# EAGLE board CT_schematic (EAGLE 7.6.0)

Size 100 x 80 mm. Coordinates in mm from the lower left corner, seen from the top.
Outline: 0,0 100,0 100,80 0,80 0,0
Copper layers (1*16): Top 0.035mm / dielectric 1.5mm / Bottom 0.035mm
Design rules "default": minimum track width 10mil, minimum drill 24mil, track to track 8mil, track to pad 8mil, pad to pad 8mil, via to via 8mil, smd to smd 8mil, copper to edge 40mil, drill to drill 8mil, minimum pad ring 10mil, minimum via ring 8mil, stop-mask expansion 4mil, vias tented up to drill 0mil, thermal gap 10mil

## Footprints (pad centres in the part's own frame; a part is rotated, then mirrored left to right if it is on the bottom)
C0603 = smd 0.8 x 0.8: 1 -0.762,0; 2 0.762,0
C0402 = smd 0.5 x 0.5: 1 -0.508,0; 2 0.508,0
C1206 = smd 1.3 x 1.6: 1 -1.524,0; 2 1.524,0
C1210 = smd 1.2 x 2.5: 1 -1.524,0; 2 1.524,0
EXV-9H = smd 3.505 x 1.676: 1 -2.857,0; 2 2.857,0
L0603 = smd 0.8 x 0.8: 1 -0.762,0; 2 0.762,0
L1210 = smd 1.2 x 2.5: 1 -1.524,0; 2 1.524,0
PJ-037B_PACKAGE = drill 3.7 square: 1 12,0 | drill 3.2 square: 2 6,0
R0603 = smd 0.8 x 0.8: 1 -0.762,0; 2 0.762,0
WLCSP49 = smd 0.25 x 0.25: A1 -1.2,1.2; A2 -0.8,1.2; A3 -0.4,1.2; A4 0,1.2; A5 0.4,1.2; A6 0.8,1.2; A7 1.2,1.2; B1 -1.2,0.8; B2 -0.8,0.8; B3 -0.4,0.8; B4 0,0.8; B5 0.4,0.8; B6 0.8,0.8; B7 1.2,0.8; C1 -1.2,0.4; C2 -0.8,0.4; C3 -0.4,0.4; C4 0,0.4; C5 0.4,0.4; C6 0.8,0.4; C7 1.2,0.4; D1 -1.2,0; D2 -0.8,0; D3 -0.4,0; D4 0,0; D5 0.4,0; D6 0.8,0; D7 1.2,0; E1 -1.2,-0.4; E2 -0.8,-0.4; E3 -0.4,-0.4; E4 0,-0.4; E5 0.4,-0.4; E6 0.8,-0.4; E7 1.2,-0.4; F1 -1.2,-0.8; F2 -0.8,-0.8; F3 -0.4,-0.8; F4 0,-0.8; F5 0.4,-0.8; F6 0.8,-0.8; F7 1.2,-0.8; G1 -1.2,-1.2; G2 -0.8,-1.2; G3 -0.4,-1.2; G4 0,-1.2; G5 0.4,-1.2; G6 0.8,-1.2; G7 1.2,-1.2
TST-110-05-T-D-RA = drill 1 pad 1.7 square: 1 0,0 | drill 1 pad 1.7: 2 0,2.54; 3 2.54,0; 4 2.54,2.54; 5 5.08,0; 6 5.08,2.54; 7 7.62,0; 8 7.62,2.54; 9 10.16,0; 10 10.16,2.54; 11 12.7,0; 12 12.7,2.54; 13 15.24,0; 14 15.24,2.54; 15 17.78,0; 16 17.78,2.54; 17 20.32,0; 18 20.32,2.54; 19 22.86,0; 20 22.86,2.54
SSOP-16 = smd 1.981 x 0.356: 1 -2.464,2.223; 2 -2.464,1.587; 3 -2.464,0.953; 4 -2.464,0.318; 5 -2.464,-0.318; 6 -2.464,-0.953; 7 -2.464,-1.587; 8 -2.464,-2.223; 9 2.464,-2.223; 10 2.464,-1.587; 11 2.464,-0.953; 12 2.464,-0.318; 13 2.464,0.318; 14 2.464,0.953; 15 2.464,1.587; 16 2.464,2.223
HTSS-105-01-G-D = drill 1 pad 1.8 square: 1 0,0 | drill 1 pad 1.8: 2 0,2.54; 3 2.54,0; 4 2.54,2.54; 5 5.08,0; 6 5.08,2.54; 7 7.62,0; 8 7.62,2.54; 9 10.16,0; 10 10.16,2.54
DFN8-S = smd 0.6 x 0.4: 1 -2.69,1.905; 2 -2.69,0.635; 3 -2.69,-0.635; 4 -2.69,-1.905; 5 2.69,-1.905; 6 2.69,-0.635; 7 2.69,0.635; 8 2.69,1.905
ABS07-32.768KHZ-7-T = smd 1.1 x 2.4: 1 -2.5,0; 2 0,0
ABLS-25.000MHZ-B2F-T = smd 5.6 x 2.8: 1 -3.81,0; 2 5.69,0
WSON-8 = smd 0.3 x 0.6: 1 -0.75,0; 2 0.05,0; 3 0.85,0; 4 1.65,0; 5 1.65,3.8; 6 0.85,3.8; 7 0.05,3.8; 8 -0.75,3.8 | smd 3 x 2.6: PAD 0.45,1.9
SON-6 = smd 0.55 x 0.3: 1 -0.355,0.5 | smd 0.52 x 0.3: 2 -0.37,0; 3 -0.37,-0.5; 4 0.37,-0.5; 5 0.37,0; 6 0.37,0.5
SW_4-1437565-2 = smd 1.4 x 2.1: 1 -2.23,4.55; 2 -2.23,-4.55; 3 2.23,4.55; 4 2.23,-4.55
LGM67K-G1J2-24-Z = smd 0.8 x 1.4: A -2,0; C 0,0
NC7SZ125M5X = smd 1.3 x 0.7: 1 -1.3,0.95; 2 -1.3,0; 3 -1.3,-0.95; 4 1.3,-0.95; 5 1.3,0.95

## Placement (x,y rotation side)
C1  1e-06  [C0603]  -46.99,57.15 0 top  (outside the outline)
C2  1e-07  [C0603]  -50.8,57.15 0 top  (outside the outline)
C3  1e-07  [C0603]  -54.61,57.15 0 top  (outside the outline)
C4  1e-07  [C0603]  -58.42,57.15 0 top  (outside the outline)
C5  1e-07  [C0603]  -62.23,57.15 0 top  (outside the outline)
C6  1e-07  [C0603]  -66.04,57.15 0 top  (outside the outline)
C7  4.7e-06  [C0603]  -39.37,57.15 0 top  (outside the outline)
C8  1e-08  [C0603]  -15.24,62.23 0 top  (outside the outline)
C9  1e-06  [C0603]  -19.05,62.23 0 top  (outside the outline)
C10  1e-11  [C0402]  -15.24,67.31 0 top  (outside the outline)
C11  1e-11  [C0402]  -19.05,67.31 0 top  (outside the outline)
C12  1e-11  [C0402]  -22.86,67.31 0 top  (outside the outline)
C13  1e-11  [C0402]  -26.67,67.31 0 top  (outside the outline)
C14  1e-07  [C0402]  -30.48,67.31 0 top  (outside the outline)
C15  1e-06  [C0603]  -22.86,62.23 0 top  (outside the outline)
C16  1e-06  [C0603]  -26.67,62.23 0 top  (outside the outline)
C17  2.2e-07  [C0603]  -43.18,57.15 0 top  (outside the outline)
C18  1e-06  [C0603]  -30.48,62.23 0 top  (outside the outline)
C19  1e-06  [C0603]  -34.29,62.23 0 top  (outside the outline)
C20  1e-08  [C0402]  -34.29,67.31 0 top  (outside the outline)
C21  1e-08  [C0402]  -38.1,67.31 0 top  (outside the outline)
C22  1e-05  [C1206]  -60.96,43.18 0 top  (outside the outline)
C23  1e-05  [C1210]  -48.26,44.45 0 top  (outside the outline)
C24  1e-07  [C0402]  -41.91,67.31 0 top  (outside the outline)
C25  0.0001  [EXV-9H]  -54.61,29.21 0 top  (outside the outline)
C26  0.0001  [EXV-9H]  -17.78,36.83 0 top  (outside the outline)
C27  1e-08  [C0402]  -45.72,67.31 0 top  (outside the outline)
C28  1e-08  [C0402]  -49.53,67.31 0 top  (outside the outline)
F1  240.0  [L0603]  -38.1,62.23 0 top  (outside the outline)
I1  1e-05  [L1210]  -54.61,44.45 0 top  (outside the outline)
J1  PJ-037B  [PJ-037B_PACKAGE]  -27.94,7.62 0 top  (outside the outline)
R1  10000.0  [R0603]  -48.26,50.8 0 top  (outside the outline)
R2  1000.0  [R0603]  -41.91,62.23 0 top  (outside the outline)
R3  1270.0  [R0603]  -45.72,62.23 0 top  (outside the outline)
R4  4700.0  [R0603]  -49.53,62.23 0 top  (outside the outline)
R5  2200.0  [R0603]  -53.34,62.23 0 top  (outside the outline)
R6  2200.0  [R0603]  -57.15,62.23 0 top  (outside the outline)
R7  10000.0  [R0603]  -53.34,50.8 0 top  (outside the outline)
R8  10000.0  [R0603]  -58.42,50.8 0 top  (outside the outline)
R9  100000.0  [R0603]  -27.94,50.8 0 top  (outside the outline)
R10  10000.0  [R0603]  -63.5,50.8 0 top  (outside the outline)
R11  10000.0  [R0603]  -15.24,57.15 0 top  (outside the outline)
R12  10000.0  [R0603]  -20.32,57.15 0 top  (outside the outline)
R13  100000.0  [R0603]  -33.02,50.8 0 top  (outside the outline)
R14  1500.0  [R0603]  -60.96,62.23 0 top  (outside the outline)
R15  1000.0  [R0603]  -64.77,62.23 0 top  (outside the outline)
R16  10000.0  [R0603]  -25.4,57.15 0 top  (outside the outline)
R17  10000.0  [R0603]  -30.48,57.15 0 top  (outside the outline)
R18  18000.0  [R0603]  -35.56,57.15 0 top  (outside the outline)
R19  470000.0  [R0603]  -38.1,50.8 0 top  (outside the outline)
R20  120000.0  [R0603]  -43.18,50.8 0 top  (outside the outline)
U1  STM32F301C8Y6  [WLCSP49]  -55.88,36.83 0 top  (outside the outline)
U2  TST-110-05-T-D-RA  [TST-110-05-T-D-RA]  -46.99,26.67 0 top  (outside the outline)
U3  LTC2804CGN-1#PBF  [SSOP-16]  -64.77,5.08 0 top  (outside the outline)
U4  HTSS-105-01-G-D  [HTSS-105-01-G-D]  -40.64,19.05 0 top  (outside the outline)
U5  24AA256-I/MF  [DFN8-S]  -22.86,20.32 0 top  (outside the outline)
U6  ABS07-32.768KHZ-7-T  [ABS07-32.768KHZ-7-T]  -27.94,44.45 0 top  (outside the outline)
U7  ABLS-25.000MHZ-B2F-T  [ABLS-25.000MHZ-B2F-T]  -36.83,36.83 0 top  (outside the outline)
U8  LP3878SDX-ADJ/NOPB  [WSON-8]  -60.96,17.78 0 top  (outside the outline)
U9  TPS3895ADRYR  [SON-6]  -52.07,66.04 0 top  (outside the outline)
U10  4-1437565-2  [SW_4-1437565-2]  -44.45,6.35 0 top  (outside the outline)
U11  Q65110A2395  [LGM67K-G1J2-24-Z]  -36.83,44.45 0 top  (outside the outline)
U12  nc7sz125m5x  [NC7SZ125M5X]  -15.24,50.8 0 top  (outside the outline)
U13  nc7sz125m5x  [NC7SZ125M5X]  -21.59,50.8 0 top  (outside the outline)

## Library data of the parts
C1-C28 F1 I1 J1 R1-R20 U1-U13 = circuit_tree

## Nets
CLK_CRYSTAL_U1_C6: C10.1 U1.C6 U6.1
CLK_CRYSTAL_U1_C7: C11.1 U1.C7 U6.2
CLK_CRYSTAL_U1_D6: C12.1 U1.D6 U7.1
CLK_CRYSTAL_U1_D7: C13.1 U1.D7 U7.2
GND: C1.2 C2.2 C3.2 C4.2 C5.2 C6.2 C7.2 C8.2 C9.2 C10.2 C11.2 C12.2 C13.2 C14.2 C15.2 C16.2 C18.2 C19.2 C20.2 C21.2 C22.2 C23.2 C24.2 C25.2 C26.2 C27.2 C28.2 J1.2 R2.2 R7.2 R15.2 R18.2 R20.2 U1.B1 U1.D3 U1.E6 U1.F7 U2.4 U2.6 U2.8 U2.10 U2.12 U2.14 U2.16 U2.18 U2.20 U3.8 U4.9 U5.4 U8.3 U8.PAD U9.2 U11.C U12.2 U12.3 U13.1 U13.3
NET_U1_A2: R5.1 U1.A2 U5.6
NET_U1_A5: R7.1 U1.A5
NET_U1_A6: C8.1 C9.1 F1.1 U1.A6
NET_U1_C5: R6.1 U1.C5 U5.5
NET_U1_E7: R4.1 U1.E7 U13.4
NET_U1_G6: R3.1 U1.G6 U11.A
NET_U1_G7: R1.1 U1.G7 U10.3 U10.4
NET_U3_6: C15.1 U3.6
NET_U3_7: C17.1 I1.2 U3.7
NET_U3_9: C16.1 U3.9
NET_U3_10: C17.2 U3.10
NET_U3_11: R9.1 U3.11
NET_U4_3: U3.1 U4.3
NET_U4_4: U3.2 U4.4
NET_U4_5: U3.3 U4.5
NET_U4_6: U3.4 U4.6
NET_U5_1: R10.1 U5.1
NET_U5_2: R11.1 U5.2
NET_U5_3: R12.1 U5.3
NET_U8_1: C21.1 U8.1
NET_U8_6: R14.2 R15.1 U8.6
NET_U8_8: R13.1 U8.8
NET_U9_1: R17.1 R18.1 U9.1
NET_U9_3: R19.2 R20.1 U9.3
NET_U9_4: R16.1 U9.4 U12.4 U13.2
NET_U10_1: R2.1 U10.1 U10.2
PROC_SYS_JTCK_SWCLK: U1.A1 U2.9
PROC_SYS_JTDO_TRACESWO: U1.A3 U2.13
PROC_SYS_JTMS_SWDIO: U1.B3 U2.7
PROC_USART1_CTS: U1.C1 U3.13
PROC_USART1_RTS: U1.C3 U3.15
PROC_USART1_RX: U1.C2 U3.16
PROC_USART1_TX: U1.C4 U3.14
RST_OUT_U2_SRESET_B: R8.1 U2.15 U12.1
VCC_S1_6V4: C22.1 C25.1 C26.1 J1.1 R13.2 U8.4
VCC_TIER1_2V5: C1.1 C2.1 C3.1 C4.1 C5.1 C6.1 C7.1 C14.1 C18.1 C19.1 C20.1 C23.1 C24.1 C27.1 C28.1 F1.2 I1.1 R1.2 R3.2 R4.2 R5.2 R6.2 R8.2 R9.2 R10.2 R11.2 R12.2 R14.1 R16.2 R17.2 R19.1 U1.B2 U1.B6 U1.B7 U1.F2 U2.1 U3.5 U3.12 U5.7 U5.8 U8.5 U9.6 U12.5 U13.5

## Tracks (layer width: path | path; a pad name or v marks a point on that pad's centre or on a via)
CLK_CRYSTAL_U1_C6  (2 unrouted)
CLK_CRYSTAL_U1_C7  (2 unrouted)
CLK_CRYSTAL_U1_D6  (2 unrouted)
CLK_CRYSTAL_U1_D7  (2 unrouted)
GND  (56 unrouted)
NET_U1_A2  (2 unrouted)
NET_U1_A5  (1 unrouted)
NET_U1_A6  (3 unrouted)
NET_U1_C5  (2 unrouted)
NET_U1_E7  (2 unrouted)
NET_U1_G6  (2 unrouted)
NET_U1_G7  (3 unrouted)
NET_U3_6  (1 unrouted)
NET_U3_7  (2 unrouted)
NET_U3_9  (1 unrouted)
NET_U3_10  (1 unrouted)
NET_U3_11  (1 unrouted)
NET_U4_3  (1 unrouted)
NET_U4_4  (1 unrouted)
NET_U4_5  (1 unrouted)
NET_U4_6  (1 unrouted)
NET_U5_1  (1 unrouted)
NET_U5_2  (1 unrouted)
NET_U5_3  (1 unrouted)
NET_U8_1  (1 unrouted)
NET_U8_6  (2 unrouted)
NET_U8_8  (1 unrouted)
NET_U9_1  (2 unrouted)
NET_U9_3  (2 unrouted)
NET_U9_4  (3 unrouted)
NET_U10_1  (2 unrouted)
PROC_SYS_JTCK_SWCLK  (1 unrouted)
PROC_SYS_JTDO_TRACESWO  (1 unrouted)
PROC_SYS_JTMS_SWDIO  (1 unrouted)
PROC_USART1_CTS  (1 unrouted)
PROC_USART1_RTS  (1 unrouted)
PROC_USART1_RX  (1 unrouted)
PROC_USART1_TX  (1 unrouted)
RST_OUT_U2_SRESET_B  (2 unrouted)
VCC_S1_6V4  (5 unrouted)
VCC_TIER1_2V5  (43 unrouted)